# Altium PCB main.PcbDoc (part 10 of 16)
Units mil, origin at the board's own origin, x right, y up, seen from the top; angles counter-clockwise.
Board outline 8394.75 x 5164.44 mil, 7 copper layers (Top Layer 1, Layer 2, Layer 3, Unused, Layer 4_pow, Layer 5_gnd, Bottom 6+gnd), stack 64.043 mil thick; 364 components, 409 nets, 1932 pads, 1061 vias.
Unrouted connection lines stored in the file: 2.
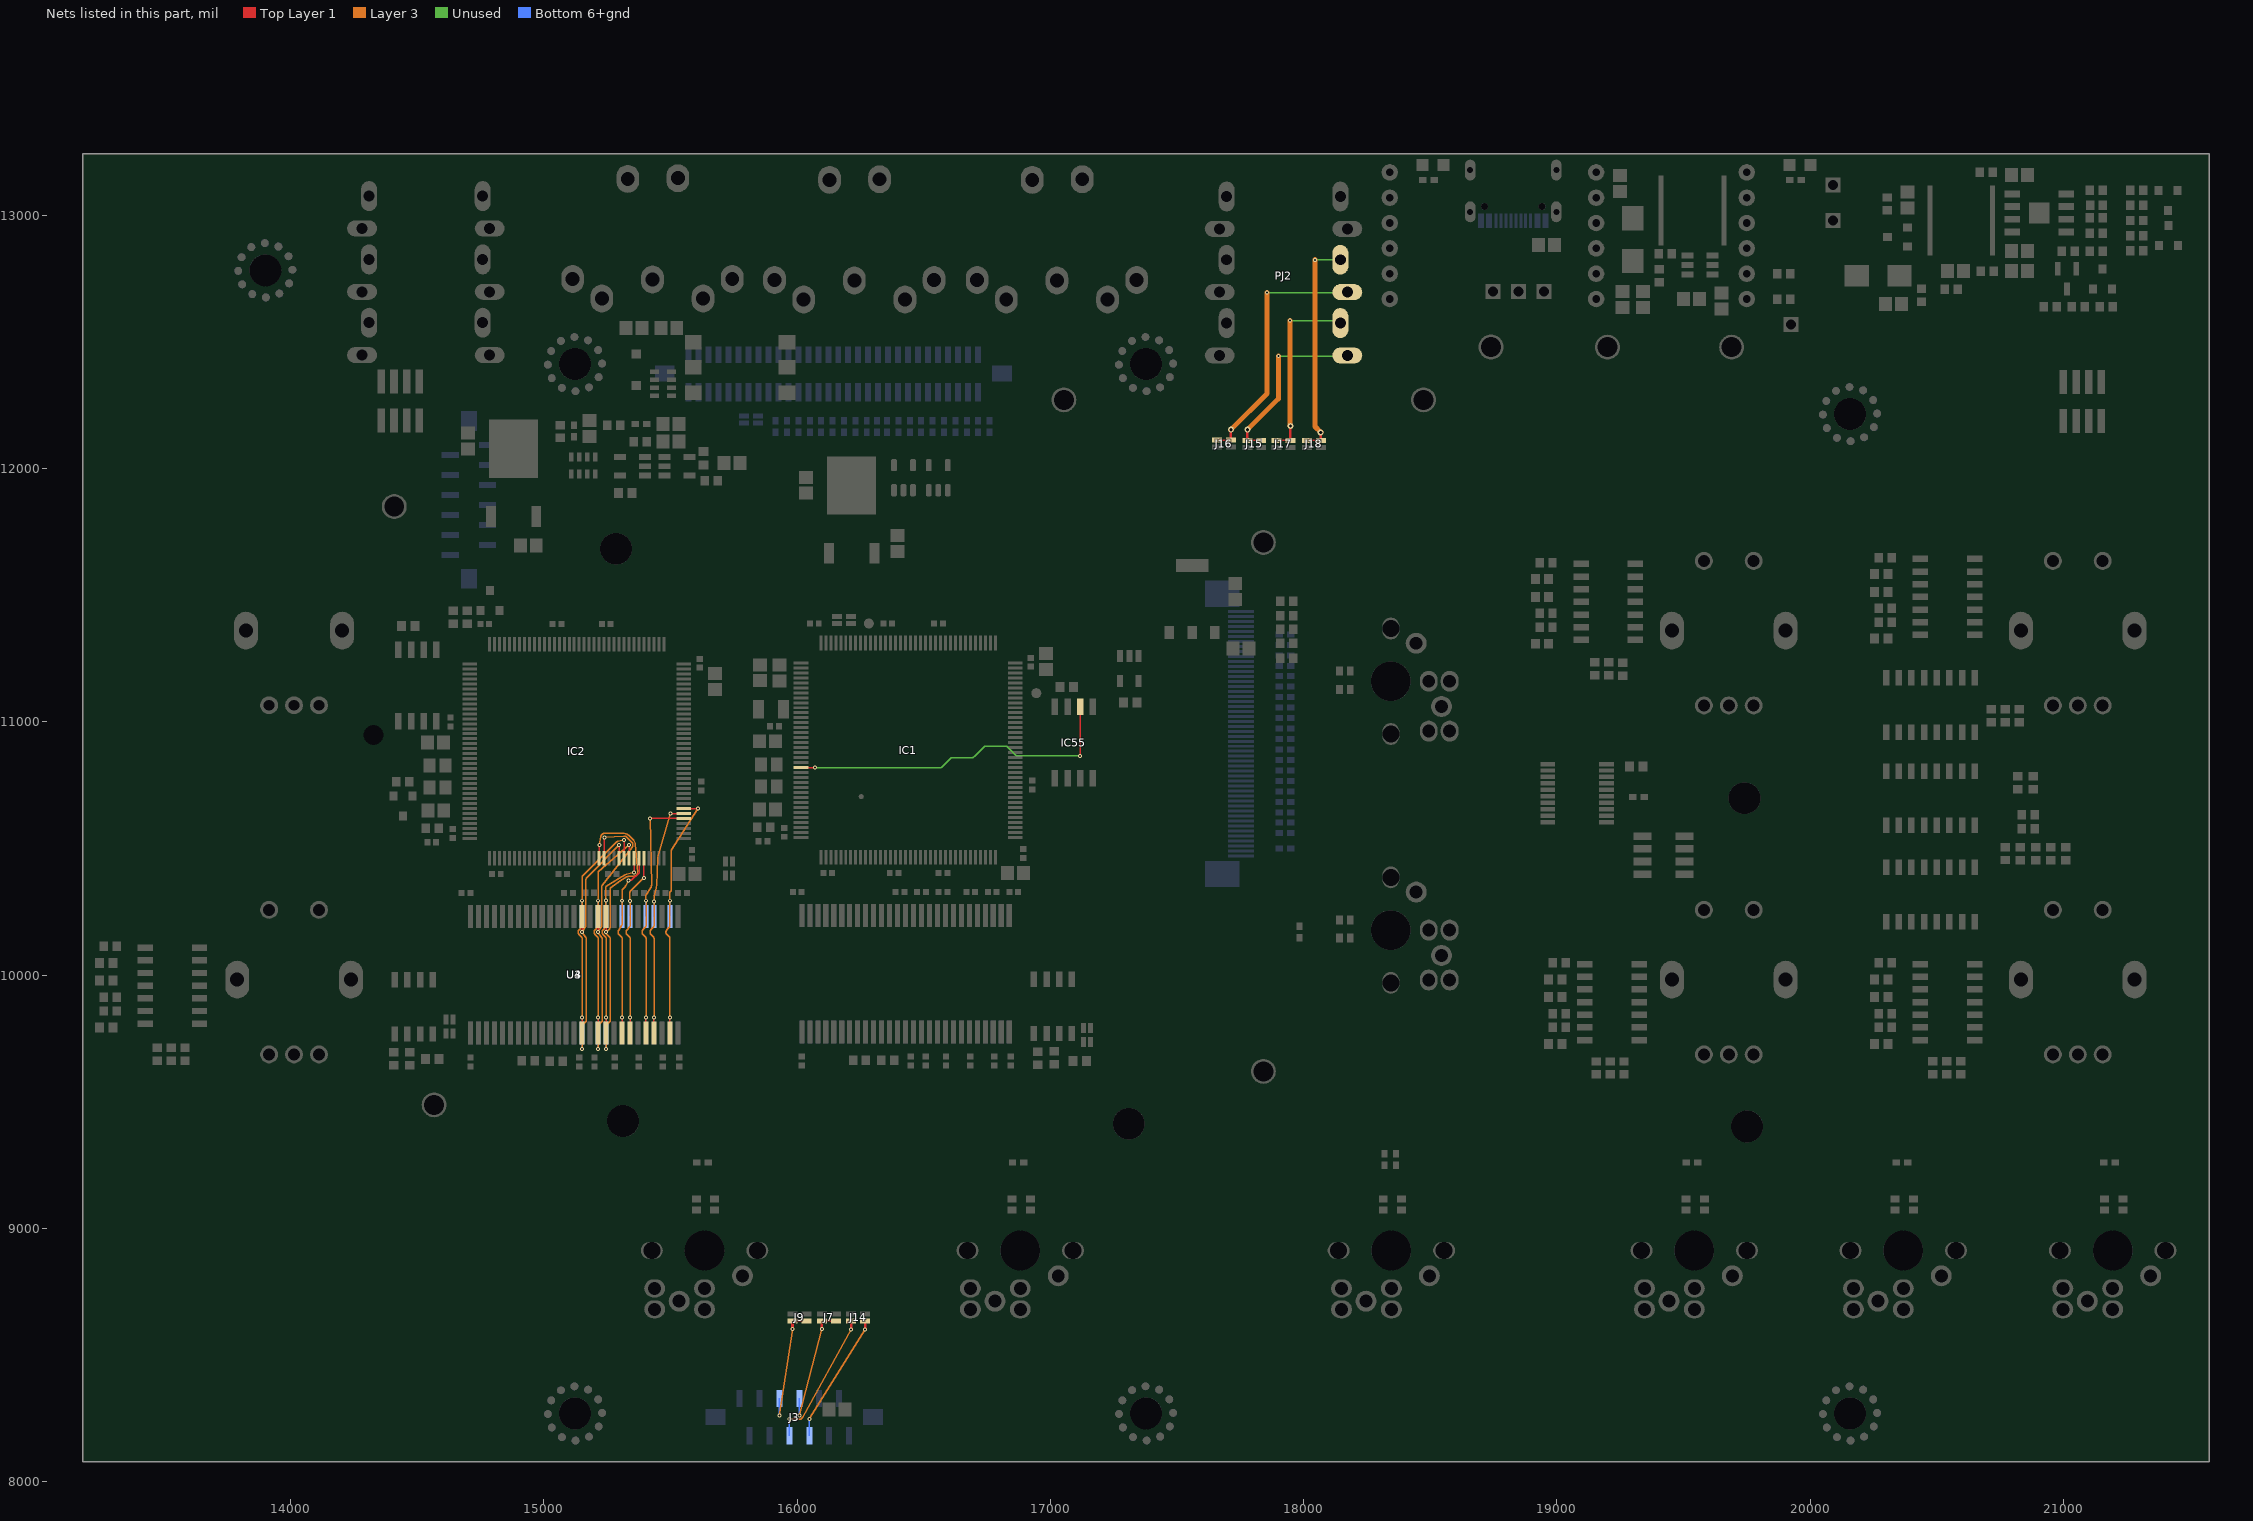
[diagram p13: the nets of this part, all layers, seen from the top]

## Via types
v1: diameter 15.75, hole 7.87, Top Layer 1 to Bottom 6+gnd, tented both sides, 961 vias
v2: diameter 27.56, hole 11.81, Top Layer 1 to Bottom 6+gnd, 45 vias
v3: diameter 23.62/23.62/23.62/23.62/23.62/23.62/23.62 (per signal layer), hole 12, Top Layer 1 to Bottom 6+gnd, tented top, 42 vias
v4: diameter 15.75, hole 7.87, Top Layer 1 to Bottom 6+gnd, 10 vias
v5: diameter 23.62/23.62/23.62/23.62/23.62/23.62/23.62 (per signal layer), hole 12, Top Layer 1 to Bottom 6+gnd, tented bottom, 3 vias

## Nets (pads, with @x,y where several pads share a name; then routed paths per layer and width w, separated by ;. In a path a pad name is that pad's centre, name@x,y a point inside that pad or via, vN(x,y) a via of type N, cw(c..) or ccw(c..) an arc to the next point about the centre after c; other vN are vias at no path point) (continued)
DD5: IC2.59 U3.10 U4.10 | length 2188.2
  Top Layer 1 w5: IC2.59@15218.43,10461.87 15219,10462.44 15219,10513.82 v1(15219.57,10514.39) ; v1@15245.83,10170.19 U3.10@15245.83,10232.03
  Layer 3 w5: v1(15219.57,10514.39) 15224.66,10547 cw(c15239.85,10544.63) 15239.9,10560 15317.01,10559.77 ; v1(15245.59,9709.31) 15245.59,9803 15261.71,9819.12 15261.71,10145.78 ; 15327.17,10387.95 cw(c15334.85,10374.63) 15334.15,10389.99 ; v1@15245.59,10167.87 ccw(c15250.59,10167.88) v1@15246.83,10164.58 ; v1@15245.59,10167.87 ccw(c15250.59,10167.88) v1@15246.83,10164.58 ; v1@15245.59,10167.87 ccw(c15250.59,10167.88) v1@15246.83,10164.58 ; v1@15245.59,10167.87 ccw(c15250.59,10167.88) v1@15246.83,10164.58 ; v1@15245.59,10167.87 ccw(c15250.59,10167.88) v1@15246.83,10164.58 ; v1@15245.59,10167.87 ccw(c15250.59,10167.88) v1@15246.83,10164.58 ; v1@15245.59,10167.87 ccw(c15250.59,10167.88) v1@15246.83,10164.58 ; v1@15245.59,10167.87 ccw(c15250.59,10167.88) v1@15246.83,10164.58 ; v1@15245.59,10167.87 ccw(c15250.59,10167.88) v1@15246.83,10164.58 ; v1@15245.59,10167.87 ccw(c15250.59,10167.88) v1@15246.83,10164.58 ; v1@15245.59,10167.87 ccw(c15250.59,10167.88) v1@15246.83,10164.58 ; v1@15245.59,10167.87 ccw(c15250.59,10167.88) v1@15246.83,10164.58 ; v1@15245.59,10167.87 ccw(c15250.59,10167.88) v1@15246.83,10164.58 ; v1@15245.59,10167.87 ccw(c15250.59,10167.88) v1@15246.83,10164.58 ; v1@15245.59,10167.87 ccw(c15250.59,10167.88) v1@15246.83,10164.58 ; v1@15245.59,10167.87 ccw(c15250.59,10167.88) v1@15246.83,10164.58 ; v1@15245.59,10167.87 v1(15245.59,10169.94) 15259.84,10184.24 ccw(c15256.3,10187.77) 15261.3,10187.68 15261.3,10340.53 cw(c15266.3,10340.53) 15263.3,10344.53 15300.79,10372.62 ; v1@15246.83,10164.58 15260.47,10149.04 ; 15260.47,10149.04 cw(c15256.71,10145.74) 15261.71,10145.83 ; 15260.47,10149.04 cw(c15256.71,10145.74) 15261.71,10145.83 ; 15260.47,10149.04 cw(c15256.71,10145.74) 15261.71,10145.83 ; 15260.47,10149.04 cw(c15256.71,10145.74) 15261.71,10145.83 ; 15260.47,10149.04 cw(c15256.71,10145.74) 15261.71,10145.83 ; 15260.47,10149.04 cw(c15256.71,10145.74) 15261.71,10145.83 ; 15260.47,10149.04 cw(c15256.71,10145.74) 15261.71,10145.83 ; 15260.47,10149.04 cw(c15256.71,10145.74) 15261.71,10145.83 ; 15260.47,10149.04 cw(c15256.71,10145.74) 15261.71,10145.83 ; 15260.47,10149.04 cw(c15256.71,10145.74) 15261.71,10145.83 ; 15260.47,10149.04 cw(c15256.71,10145.74) 15261.71,10145.83 ; 15260.47,10149.04 cw(c15256.71,10145.74) 15261.71,10145.83 ; 15260.47,10149.04 cw(c15256.71,10145.74) 15261.71,10145.83 ; 15260.47,10149.04 cw(c15256.71,10145.74) 15261.71,10145.83 ; 15260.47,10149.04 cw(c15256.71,10145.74) 15261.71,10145.83 ; 15260.47,10149.04 cw(c15256.71,10145.74) 15261.71,10145.83 ; 15300.79,10372.62 cw(c15310,10360.32) 15302.33,10373.64 ; 15300.79,10372.62 cw(c15310,10360.32) 15302.33,10373.64 ; 15300.79,10372.62 cw(c15310,10360.32) 15302.33,10373.64 ; 15300.79,10372.62 cw(c15310,10360.32) 15302.33,10373.64 ; 15300.79,10372.62 cw(c15310,10360.32) 15302.33,10373.64 ; 15300.79,10372.62 cw(c15310,10360.32) 15302.33,10373.64 ; 15300.79,10372.62 cw(c15310,10360.32) 15302.33,10373.64 ; 15300.79,10372.62 cw(c15310,10360.32) 15302.33,10373.64 ; 15300.79,10372.62 cw(c15310,10360.32) 15302.33,10373.64 ; 15300.79,10372.62 cw(c15310,10360.32) 15302.33,10373.64 ; 15300.79,10372.62 cw(c15310,10360.32) 15302.33,10373.64 ; 15300.79,10372.62 cw(c15310,10360.32) 15302.33,10373.64 ; 15300.79,10372.62 cw(c15310,10360.32) 15302.33,10373.64 ; 15300.79,10372.62 cw(c15310,10360.32) 15302.33,10373.64 ; 15300.79,10372.62 cw(c15310,10360.32) 15302.33,10373.64 ; 15300.79,10372.62 cw(c15310,10360.32) 15302.33,10373.64 ; 15302.33,10373.64 15327.18,10387.95 ; 15317.01,10559.77 cw(c15316.94,10534.39) 15335.17,10552.04 ; 15317.01,10559.77 cw(c15316.94,10534.39) 15335.17,10552.04 ; 15317.01,10559.77 cw(c15316.94,10534.39) 15335.17,10552.04 ; 15317.01,10559.77 cw(c15316.94,10534.39) 15335.17,10552.04 ; 15317.01,10559.77 cw(c15316.94,10534.39) 15335.17,10552.04 ; 15317.01,10559.77 cw(c15316.94,10534.39) 15335.17,10552.04 ; 15317.01,10559.77 cw(c15316.94,10534.39) 15335.17,10552.04 ; 15317.01,10559.77 cw(c15316.94,10534.39) 15335.17,10552.04 ; 15317.01,10559.77 cw(c15316.94,10534.39) 15335.17,10552.04 ; 15317.01,10559.77 cw(c15316.94,10534.39) 15335.17,10552.04 ; 15317.01,10559.77 cw(c15316.94,10534.39) 15335.17,10552.04 ; 15317.01,10559.77 cw(c15316.94,10534.39) 15335.17,10552.04 ; 15317.01,10559.77 cw(c15316.94,10534.39) 15335.17,10552.04 ; 15317.01,10559.77 cw(c15316.94,10534.39) 15335.17,10552.04 ; 15317.01,10559.77 cw(c15316.94,10534.39) 15335.17,10552.04 ; 15317.01,10559.77 cw(c15316.94,10534.39) 15335.17,10552.04 ; 15327.18,10387.95 cw(c15334.85,10374.63) 15334.15,10389.99 ; 15327.18,10387.95 cw(c15334.85,10374.63) 15334.15,10389.99 ; 15327.18,10387.95 cw(c15334.85,10374.63) 15334.15,10389.99 ; 15327.18,10387.95 cw(c15334.85,10374.63) 15334.15,10389.99 ; 15327.18,10387.95 cw(c15334.85,10374.63) 15334.15,10389.99 ; 15327.18,10387.95 cw(c15334.85,10374.63) 15334.15,10389.99 ; 15327.18,10387.95 cw(c15334.85,10374.63) 15334.15,10389.99 ; 15327.18,10387.95 cw(c15334.85,10374.63) 15334.15,10389.99 ; 15327.18,10387.95 cw(c15334.85,10374.63) 15334.15,10389.99 ; 15327.18,10387.95 cw(c15334.85,10374.63) 15334.15,10389.99 ; 15327.18,10387.95 cw(c15334.85,10374.63) 15334.15,10389.99 ; 15327.18,10387.95 cw(c15334.85,10374.63) 15334.15,10389.99 ; 15327.18,10387.95 cw(c15334.85,10374.63) 15334.15,10389.99 ; 15327.18,10387.95 cw(c15334.85,10374.63) 15334.15,10389.99 ; 15327.18,10387.95 cw(c15334.85,10374.63) 15334.15,10389.99 ; 15334.15,10389.99 15355.9,10390.97 ; 15335.17,10552.04 15354.53,10532.04 cw(c15336.31,10514.39) 15361.6,10516.47 15370.53,10407.59 ; 15355.9,10390.97 ccw(c15355.21,10406.33) 15370.53,10407.59 ; 15355.9,10390.97 ccw(c15355.21,10406.33) 15370.53,10407.59 ; 15355.9,10390.97 ccw(c15355.21,10406.33) 15370.53,10407.59 ; 15355.9,10390.97 ccw(c15355.21,10406.33) 15370.53,10407.59 ; 15355.9,10390.97 ccw(c15355.21,10406.33) 15370.53,10407.59 ; 15355.9,10390.97 ccw(c15355.21,10406.33) 15370.53,10407.59 ; 15355.9,10390.97 ccw(c15355.21,10406.33) 15370.53,10407.59 ; 15355.9,10390.97 ccw(c15355.21,10406.33) 15370.53,10407.59 ; 15355.9,10390.97 ccw(c15355.21,10406.33) 15370.53,10407.59 ; 15355.9,10390.97 ccw(c15355.21,10406.33) 15370.53,10407.59 ; 15355.9,10390.97 ccw(c15355.21,10406.33) 15370.53,10407.59 ; 15355.9,10390.97 ccw(c15355.21,10406.33) 15370.53,10407.59 ; 15355.9,10390.97 ccw(c15355.21,10406.33) 15370.53,10407.59 ; 15355.9,10390.97 ccw(c15355.21,10406.33) 15370.53,10407.59 ; 15355.9,10390.97 ccw(c15355.21,10406.33) 15370.53,10407.59 ; 15355.9,10390.97 ccw(c15355.21,10406.33) 15370.53,10407.59
  Bottom 6+gnd w5: v1@15245.83,9709.56 U4.10@15245.83,9771.4
DD6: IC2.60 U3.11 U4.11 | length 1584.3
  Top Layer 1 w5: v1@15214.34,10170.19 U3.11@15214.34,10232.03 ; IC2.60@15238.28,10461.71 15238.98,10462.42 15238.98,10543.76 v1(15239.85,10544.63)
  Layer 3 w5: v1(15214.09,9709.31) 15214.09,9803 15230.21,9819.12 15230.21,10145.78 ; v1(15214.09,10169.94) ccw(c15219.09,10169.94) 15215.14,10166.88 15229.17,10148.8 ; 15229.47,10196.3 15229.47,10352.17 ; v1(15239.85,10544.63) 15315.91,10549.73 ; v1(15214.09,10169.94) cw(c15219.09,10169.94) v1@15214.93,10172.71 ; v1(15214.09,10169.94) cw(c15219.09,10169.94) v1@15214.93,10172.71 ; v1(15214.09,10169.94) cw(c15219.09,10169.94) v1@15214.93,10172.71 ; v1(15214.09,10169.94) cw(c15219.09,10169.94) v1@15214.93,10172.71 ; v1(15214.09,10169.94) cw(c15219.09,10169.94) v1@15214.93,10172.71 ; v1(15214.09,10169.94) cw(c15219.09,10169.94) v1@15214.93,10172.71 ; v1(15214.09,10169.94) cw(c15219.09,10169.94) v1@15214.93,10172.71 ; v1(15214.09,10169.94) cw(c15219.09,10169.94) v1@15214.93,10172.71 ; v1(15214.09,10169.94) cw(c15219.09,10169.94) v1@15214.93,10172.71 ; v1(15214.09,10169.94) cw(c15219.09,10169.94) v1@15214.93,10172.71 ; v1(15214.09,10169.94) cw(c15219.09,10169.94) v1@15214.93,10172.71 ; v1(15214.09,10169.94) cw(c15219.09,10169.94) v1@15214.93,10172.71 ; v1(15214.09,10169.94) cw(c15219.09,10169.94) v1@15214.93,10172.71 ; v1(15214.09,10169.94) cw(c15219.09,10169.94) v1@15214.93,10172.71 ; v1(15214.09,10169.94) cw(c15219.09,10169.94) v1@15214.93,10172.71 ; v1(15214.09,10169.94) cw(c15219.09,10169.94) v1@15214.93,10172.71 ; v1@15214.93,10172.71 15228.65,10193.6 ; 15228.65,10193.61 ccw(c15224.47,10196.34) 15229.47,10196.25 ; 15228.65,10193.61 ccw(c15224.47,10196.34) 15229.47,10196.25 ; 15228.65,10193.61 ccw(c15224.47,10196.34) 15229.47,10196.25 ; 15228.65,10193.61 ccw(c15224.47,10196.34) 15229.47,10196.25 ; 15228.65,10193.61 ccw(c15224.47,10196.34) 15229.47,10196.25 ; 15228.65,10193.61 ccw(c15224.47,10196.34) 15229.47,10196.25 ; 15228.65,10193.61 ccw(c15224.47,10196.34) 15229.47,10196.25 ; 15228.65,10193.61 ccw(c15224.47,10196.34) 15229.47,10196.25 ; 15228.65,10193.61 ccw(c15224.47,10196.34) 15229.47,10196.25 ; 15228.65,10193.61 ccw(c15224.47,10196.34) 15229.47,10196.25 ; 15228.65,10193.61 ccw(c15224.47,10196.34) 15229.47,10196.25 ; 15228.65,10193.61 ccw(c15224.47,10196.34) 15229.47,10196.25 ; 15228.65,10193.6 ccw(c15224.47,10196.34) 15229.47,10196.25 ; 15228.65,10193.6 ccw(c15224.47,10196.34) 15229.47,10196.25 ; 15228.65,10193.6 ccw(c15224.47,10196.34) 15229.47,10196.25 ; 15228.65,10193.6 ccw(c15224.47,10196.34) 15229.47,10196.25 ; 15229.16,10148.8 cw(c15225.21,10145.74) 15230.21,10145.83 ; 15229.16,10148.8 cw(c15225.21,10145.74) 15230.21,10145.83 ; 15229.16,10148.8 cw(c15225.21,10145.74) 15230.21,10145.83 ; 15229.16,10148.8 cw(c15225.21,10145.74) 15230.21,10145.83 ; 15229.16,10148.8 cw(c15225.21,10145.74) 15230.21,10145.83 ; 15229.16,10148.8 cw(c15225.21,10145.74) 15230.21,10145.83 ; 15229.16,10148.8 cw(c15225.21,10145.74) 15230.21,10145.83 ; 15229.16,10148.8 cw(c15225.21,10145.74) 15230.21,10145.83 ; 15229.16,10148.8 cw(c15225.21,10145.74) 15230.21,10145.83 ; 15229.16,10148.8 cw(c15225.21,10145.74) 15230.21,10145.83 ; 15229.16,10148.8 cw(c15225.21,10145.74) 15230.21,10145.83 ; 15229.16,10148.8 cw(c15225.21,10145.74) 15230.21,10145.83 ; 15229.16,10148.8 cw(c15225.21,10145.74) 15230.21,10145.83 ; 15229.16,10148.8 cw(c15225.21,10145.74) 15230.21,10145.83 ; 15229.16,10148.8 cw(c15225.21,10145.74) 15230.21,10145.83 ; 15229.16,10148.8 cw(c15225.21,10145.74) 15230.21,10145.83 ; 15229.47,10352.17 cw(c15234.47,10352.17) 15230.54,10355.27 ; 15229.47,10352.17 cw(c15234.47,10352.17) 15230.54,10355.27 ; 15229.47,10352.17 cw(c15234.47,10352.17) 15230.54,10355.27 ; 15229.47,10352.17 cw(c15234.47,10352.17) 15230.54,10355.27 ; 15229.47,10352.17 cw(c15234.47,10352.17) 15230.54,10355.27 ; 15229.47,10352.17 cw(c15234.47,10352.17) 15230.54,10355.27 ; 15229.47,10352.17 cw(c15234.47,10352.17) 15230.54,10355.27 ; 15229.47,10352.17 cw(c15234.47,10352.17) 15230.54,10355.27 ; 15229.47,10352.17 cw(c15234.47,10352.17) 15230.54,10355.27 ; 15229.47,10352.17 cw(c15234.47,10352.17) 15230.54,10355.27 ; 15229.47,10352.17 cw(c15234.47,10352.17) 15230.54,10355.27 ; 15229.47,10352.17 cw(c15234.47,10352.17) 15230.54,10355.27 ; 15229.47,10352.17 cw(c15234.47,10352.17) 15230.54,10355.27 ; 15229.47,10352.17 cw(c15234.47,10352.17) 15230.54,10355.27 ; 15229.47,10352.17 cw(c15234.47,10352.17) 15230.54,10355.27 ; 15229.47,10352.17 cw(c15234.47,10352.17) 15230.54,10355.27 ; 15230.54,10355.27 15348.38,10504.88 ccw(c15336.31,10514.39) 15347.35,10525.09 15327.98,10545.09 ; 15315.91,10549.73 cw(c15316.94,10534.39) 15327.98,10545.09 ; 15315.91,10549.73 cw(c15316.94,10534.39) 15327.98,10545.09 ; 15315.91,10549.73 cw(c15316.94,10534.39) 15327.98,10545.09 ; 15315.91,10549.73 cw(c15316.94,10534.39) 15327.98,10545.09 ; 15315.91,10549.73 cw(c15316.94,10534.39) 15327.98,10545.09 ; 15315.91,10549.73 cw(c15316.94,10534.39) 15327.98,10545.09 ; 15315.91,10549.73 cw(c15316.94,10534.39) 15327.98,10545.09 ; 15315.91,10549.73 cw(c15316.94,10534.39) 15327.98,10545.09 ; 15315.91,10549.73 cw(c15316.94,10534.39) 15327.98,10545.09 ; 15315.91,10549.73 cw(c15316.94,10534.39) 15327.98,10545.09 ; 15315.91,10549.73 cw(c15316.94,10534.39) 15327.98,10545.09 ; 15315.91,10549.73 cw(c15316.94,10534.39) 15327.98,10545.09 ; 15315.91,10549.73 cw(c15316.94,10534.39) 15327.98,10545.09 ; 15315.91,10549.73 cw(c15316.94,10534.39) 15327.98,10545.09 ; 15315.91,10549.73 cw(c15316.94,10534.39) 15327.98,10545.09 ; 15315.91,10549.73 cw(c15316.94,10534.39) 15327.98,10545.09
  Bottom 6+gnd w5: v1@15214.34,9709.56 U4.11@15214.34,9771.4
DD7: IC2.63 U3.13 U4.13 | length 1246.9
  Top Layer 1 w5: v1@15151.35,10170.19 U3.13@15151.35,10232.03 ; IC2.63@15297.23,10461.87 v1@15297.17,10514.16
  Layer 3 w5: v1(15151.1,9709.31) 15151.1,9803 15166.96,9818.86 15166.96,10146.04 ; v1(15151.1,10169.94) cw(c15156.1,10169.94) 15151.92,10172.68 15165.65,10193.6 ; 15166.47,10196.3 15166.47,10379.18 ; v1(15296.94,10514.39) 15167.9,10382.68 ccw(c15171.47,10379.18) 15166.47,10379.18 ; v1(15151.1,10169.94) ccw(c15156.1,10169.94) v1@15152.14,10166.89 ; v1(15151.1,10169.94) ccw(c15156.1,10169.94) v1@15152.13,10166.9 ; v1(15151.1,10169.94) ccw(c15156.1,10169.94) v1@15152.13,10166.9 ; v1(15151.1,10169.94) ccw(c15156.1,10169.94) v1@15152.13,10166.9 ; v1(15151.1,10169.94) ccw(c15156.1,10169.94) v1@15152.13,10166.9 ; v1(15151.1,10169.94) ccw(c15156.1,10169.94) v1@15152.13,10166.9 ; v1(15151.1,10169.94) ccw(c15156.1,10169.94) v1@15152.13,10166.9 ; v1(15151.1,10169.94) ccw(c15156.1,10169.94) v1@15152.13,10166.9 ; v1(15151.1,10169.94) ccw(c15156.1,10169.94) v1@15152.13,10166.9 ; v1(15151.1,10169.94) ccw(c15156.1,10169.94) v1@15152.13,10166.9 ; v1(15151.1,10169.94) ccw(c15156.1,10169.94) v1@15152.13,10166.9 ; v1(15151.1,10169.94) ccw(c15156.1,10169.94) v1@15152.13,10166.9 ; v1(15151.1,10169.94) ccw(c15156.1,10169.94) v1@15152.13,10166.9 ; v1(15151.1,10169.94) ccw(c15156.1,10169.94) v1@15152.13,10166.9 ; v1(15151.1,10169.94) ccw(c15156.1,10169.94) v1@15152.13,10166.9 ; v1(15151.1,10169.94) ccw(c15156.1,10169.94) v1@15152.13,10166.9 ; v1@15152.14,10166.89 15165.92,10149.05 ; 15165.66,10193.6 ccw(c15161.47,10196.34) 15166.47,10196.25 ; 15165.66,10193.6 ccw(c15161.47,10196.34) 15166.47,10196.25 ; 15165.66,10193.6 ccw(c15161.47,10196.34) 15166.47,10196.25 ; 15165.66,10193.6 ccw(c15161.47,10196.34) 15166.47,10196.25 ; 15165.66,10193.6 ccw(c15161.47,10196.34) 15166.47,10196.25 ; 15165.66,10193.6 ccw(c15161.47,10196.34) 15166.47,10196.25 ; 15165.66,10193.6 ccw(c15161.47,10196.34) 15166.47,10196.25 ; 15165.66,10193.6 ccw(c15161.47,10196.34) 15166.47,10196.25 ; 15165.66,10193.6 ccw(c15161.47,10196.34) 15166.47,10196.25 ; 15165.66,10193.6 ccw(c15161.47,10196.34) 15166.47,10196.25 ; 15165.66,10193.6 ccw(c15161.47,10196.34) 15166.47,10196.25 ; 15165.66,10193.6 ccw(c15161.47,10196.34) 15166.47,10196.25 ; 15165.66,10193.6 ccw(c15161.47,10196.34) 15166.47,10196.25 ; 15165.66,10193.6 ccw(c15161.47,10196.34) 15166.47,10196.25 ; 15165.66,10193.6 ccw(c15161.47,10196.34) 15166.47,10196.25 ; 15165.65,10193.6 ccw(c15161.47,10196.34) 15166.47,10196.25 ; 15165.92,10149.05 cw(c15161.96,10146) 15166.96,10146.09 ; 15165.92,10149.05 cw(c15161.96,10146) 15166.96,10146.09 ; 15165.92,10149.05 cw(c15161.96,10146) 15166.96,10146.09 ; 15165.92,10149.05 cw(c15161.96,10146) 15166.96,10146.09 ; 15165.92,10149.05 cw(c15161.96,10146) 15166.96,10146.09 ; 15165.92,10149.05 cw(c15161.96,10146) 15166.96,10146.09 ; 15165.92,10149.05 cw(c15161.96,10146) 15166.96,10146.09 ; 15165.92,10149.05 cw(c15161.96,10146) 15166.96,10146.09 ; 15165.92,10149.05 cw(c15161.96,10146) 15166.96,10146.09 ; 15165.92,10149.05 cw(c15161.96,10146) 15166.96,10146.09 ; 15165.92,10149.05 cw(c15161.96,10146) 15166.96,10146.09 ; 15165.92,10149.05 cw(c15161.96,10146) 15166.96,10146.09 ; 15165.92,10149.05 cw(c15161.96,10146) 15166.96,10146.09 ; 15165.92,10149.05 cw(c15161.96,10146) 15166.96,10146.09 ; 15165.92,10149.05 cw(c15161.96,10146) 15166.96,10146.09 ; 15165.92,10149.05 cw(c15161.96,10146) 15166.96,10146.09 ; 15166.47,10379.18 cw(c15171.47,10379.18) 15167.89,10382.67 ; 15166.47,10379.18 cw(c15171.47,10379.18) 15167.89,10382.67 ; 15166.47,10379.18 cw(c15171.47,10379.18) 15167.89,10382.67 ; 15166.47,10379.18 cw(c15171.47,10379.18) 15167.89,10382.67 ; 15166.47,10379.18 cw(c15171.47,10379.18) 15167.89,10382.67 ; 15166.47,10379.18 cw(c15171.47,10379.18) 15167.89,10382.67 ; 15166.47,10379.18 cw(c15171.47,10379.18) 15167.89,10382.67 ; 15166.47,10379.18 cw(c15171.47,10379.18) 15167.89,10382.66 ; 15166.47,10379.18 cw(c15171.47,10379.18) 15167.89,10382.66 ; 15166.47,10379.18 cw(c15171.47,10379.18) 15167.89,10382.66 ; 15166.47,10379.18 cw(c15171.47,10379.18) 15167.89,10382.66 ; 15166.47,10379.18 cw(c15171.47,10379.18) 15167.89,10382.66 ; 15166.47,10379.18 cw(c15171.47,10379.18) 15167.89,10382.66 ; 15166.47,10379.18 cw(c15171.47,10379.18) 15167.89,10382.66 ; 15166.47,10379.18 cw(c15171.47,10379.18) 15167.89,10382.66
  Bottom 6+gnd w5: v1@15151.35,9709.56 U4.13@15151.35,9771.4
DD8: IC2.64 U3.42 U4.42 | length 1288.6
  Top Layer 1 w5: U3.42@15151.35,9771.4 v1@15151.35,9833.24 ; IC2.64@15317.02,10461.71 v1@15317.02,10534.31
  Layer 3 w5: v1(15151.59,9833.49) 15151.59,10145.64 ; 15151.59,10195.56 15151.59,10293.63 v1(15151.1,10294.12) 15151.1,10388.23 ; v1(15316.94,10534.39) 15293.72,10529.43 ; 15150.13,10149.12 cw(c15146.59,10145.59) 15151.59,10145.68 ; 15150.13,10149.12 cw(c15146.59,10145.59) 15151.59,10145.68 ; 15150.13,10149.12 cw(c15146.59,10145.59) 15151.59,10145.68 ; 15150.13,10149.12 cw(c15146.59,10145.59) 15151.59,10145.68 ; 15150.13,10149.12 cw(c15146.59,10145.59) 15151.59,10145.68 ; 15150.13,10149.12 cw(c15146.59,10145.59) 15151.59,10145.68 ; 15150.13,10149.12 cw(c15146.59,10145.59) 15151.59,10145.68 ; 15150.13,10149.12 cw(c15146.59,10145.59) 15151.59,10145.68 ; 15150.13,10149.12 cw(c15146.59,10145.59) 15151.59,10145.68 ; 15150.13,10149.12 cw(c15146.59,10145.59) 15151.59,10145.68 ; 15150.13,10149.12 cw(c15146.59,10145.59) 15151.59,10145.68 ; 15150.13,10149.12 cw(c15146.59,10145.59) 15151.59,10145.68 ; 15150.13,10149.12 cw(c15146.59,10145.59) 15151.59,10145.68 ; 15150.13,10149.12 cw(c15146.59,10145.59) 15151.59,10145.68 ; 15150.13,10149.12 cw(c15146.59,10145.59) 15151.59,10145.68 ; 15150.13,10149.12 cw(c15146.59,10145.59) 15151.59,10145.68 ; 15150.13,10149.12 15140.21,10159.1 cw(c15151.1,10169.94) 15139.58,10180.12 15150.34,10192.29 ; 15150.34,10192.29 ccw(c15146.59,10195.6) 15151.59,10195.51 ; 15150.34,10192.29 ccw(c15146.59,10195.6) 15151.59,10195.51 ; 15150.34,10192.29 ccw(c15146.59,10195.6) 15151.59,10195.51 ; 15150.34,10192.29 ccw(c15146.59,10195.6) 15151.59,10195.51 ; 15150.34,10192.29 ccw(c15146.59,10195.6) 15151.59,10195.51 ; 15150.34,10192.29 ccw(c15146.59,10195.6) 15151.59,10195.51 ; 15150.34,10192.29 ccw(c15146.59,10195.6) 15151.59,10195.51 ; 15150.34,10192.29 ccw(c15146.59,10195.6) 15151.59,10195.51 ; 15150.34,10192.29 ccw(c15146.59,10195.6) 15151.59,10195.51 ; 15150.34,10192.29 ccw(c15146.59,10195.6) 15151.59,10195.51 ; 15150.34,10192.29 ccw(c15146.59,10195.6) 15151.59,10195.51 ; 15150.34,10192.29 ccw(c15146.59,10195.6) 15151.59,10195.51 ; 15150.34,10192.29 ccw(c15146.59,10195.6) 15151.59,10195.51 ; 15150.34,10192.29 ccw(c15146.59,10195.6) 15151.59,10195.51 ; 15150.34,10192.29 ccw(c15146.59,10195.6) 15151.59,10195.51 ; 15150.34,10192.29 ccw(c15146.59,10195.6) 15151.59,10195.51 ; 15151.1,10388.23 cw(c15156.1,10388.23) 15152.55,10391.74 ; 15151.1,10388.23 cw(c15156.1,10388.23) 15152.55,10391.74 ; 15151.1,10388.23 cw(c15156.1,10388.23) 15152.55,10391.74 ; 15151.1,10388.23 cw(c15156.1,10388.23) 15152.55,10391.74 ; 15151.1,10388.23 cw(c15156.1,10388.23) 15152.55,10391.74 ; 15151.1,10388.23 cw(c15156.1,10388.23) 15152.55,10391.74 ; 15151.1,10388.23 cw(c15156.1,10388.23) 15152.55,10391.74 ; 15151.1,10388.23 cw(c15156.1,10388.23) 15152.55,10391.74 ; 15151.1,10388.23 cw(c15156.1,10388.23) 15152.55,10391.74 ; 15151.1,10388.23 cw(c15156.1,10388.23) 15152.55,10391.74 ; 15151.1,10388.23 cw(c15156.1,10388.23) 15152.55,10391.74 ; 15151.1,10388.23 cw(c15156.1,10388.23) 15152.55,10391.74 ; 15151.1,10388.23 cw(c15156.1,10388.23) 15152.55,10391.74 ; 15151.1,10388.23 cw(c15156.1,10388.23) 15152.55,10391.74 ; 15151.1,10388.23 cw(c15156.1,10388.23) 15152.55,10391.74 ; 15151.1,10388.23 cw(c15156.1,10388.23) 15152.55,10391.74 ; 15152.55,10391.74 15286.08,10525.28 ; 15286.08,10525.28 cw(c15296.94,10514.39) 15293.72,10529.43 ; 15286.08,10525.28 cw(c15296.94,10514.39) 15293.72,10529.43 ; 15286.08,10525.28 cw(c15296.94,10514.39) 15293.72,10529.43 ; 15286.08,10525.28 cw(c15296.94,10514.39) 15293.72,10529.43 ; 15286.08,10525.28 cw(c15296.94,10514.39) 15293.72,10529.43 ; 15286.08,10525.28 cw(c15296.94,10514.39) 15293.72,10529.43 ; 15286.08,10525.28 cw(c15296.94,10514.39) 15293.72,10529.43 ; 15286.08,10525.28 cw(c15296.94,10514.39) 15293.72,10529.43 ; 15286.08,10525.28 cw(c15296.94,10514.39) 15293.72,10529.43 ; 15286.08,10525.28 cw(c15296.94,10514.39) 15293.72,10529.43 ; 15286.08,10525.28 cw(c15296.94,10514.39) 15293.72,10529.43 ; 15286.08,10525.28 cw(c15296.94,10514.39) 15293.72,10529.43 ; 15286.08,10525.28 cw(c15296.94,10514.39) 15293.72,10529.43 ; 15286.08,10525.28 cw(c15296.94,10514.39) 15293.72,10529.43 ; 15286.08,10525.28 cw(c15296.94,10514.39) 15293.72,10529.43 ; 15286.08,10525.28 cw(c15296.94,10514.39) 15293.72,10529.43
  Bottom 6+gnd w5: U4.42@15151.35,10232.03 v1@15151.35,10293.87
DD9: IC2.65 U3.44 U4.44 | length 1096.9
  Top Layer 1 w5: U3.44@15214.34,9771.4 v1@15214.34,9833.24 ; IC2.65@15336.54,10461.87 v1@15336.54,10514.16
  Layer 3 w5: v1(15214.58,9833.49) 15214.58,10145.64 ; 15214.58,10195.56 15214.58,10293.63 v1(15214.09,10294.12) 15214.09,10404.3 ; v1(15336.31,10514.39) 15215.78,10408.04 ; 15213.13,10149.12 cw(c15209.58,10145.59) 15214.58,10145.68 ; 15213.13,10149.12 cw(c15209.58,10145.59) 15214.58,10145.68 ; 15213.13,10149.12 cw(c15209.58,10145.59) 15214.58,10145.68 ; 15213.13,10149.12 cw(c15209.58,10145.59) 15214.58,10145.68 ; 15213.13,10149.12 cw(c15209.58,10145.59) 15214.58,10145.68 ; 15213.13,10149.12 cw(c15209.58,10145.59) 15214.58,10145.68 ; 15213.13,10149.12 cw(c15209.58,10145.59) 15214.58,10145.68 ; 15213.13,10149.12 cw(c15209.58,10145.59) 15214.58,10145.68 ; 15213.13,10149.12 cw(c15209.58,10145.59) 15214.58,10145.68 ; 15213.13,10149.12 cw(c15209.58,10145.59) 15214.58,10145.68 ; 15213.13,10149.12 cw(c15209.58,10145.59) 15214.58,10145.68 ; 15213.13,10149.12 cw(c15209.58,10145.59) 15214.58,10145.68 ; 15213.13,10149.12 cw(c15209.58,10145.59) 15214.58,10145.68 ; 15213.13,10149.12 cw(c15209.58,10145.59) 15214.58,10145.68 ; 15213.13,10149.12 cw(c15209.58,10145.59) 15214.58,10145.68 ; 15213.13,10149.12 cw(c15209.58,10145.59) 15214.58,10145.68 ; 15213.13,10149.12 15203.2,10159.1 cw(c15214.09,10169.94) 15202.57,10180.12 15213.33,10192.29 ; 15213.33,10192.29 ccw(c15209.58,10195.6) 15214.58,10195.51 ; 15213.33,10192.29 ccw(c15209.58,10195.6) 15214.58,10195.51 ; 15213.33,10192.29 ccw(c15209.58,10195.6) 15214.58,10195.51 ; 15213.33,10192.29 ccw(c15209.58,10195.6) 15214.58,10195.51 ; 15213.33,10192.29 ccw(c15209.58,10195.6) 15214.58,10195.51 ; 15213.33,10192.29 ccw(c15209.58,10195.6) 15214.58,10195.51 ; 15213.33,10192.29 ccw(c15209.58,10195.6) 15214.58,10195.51 ; 15213.33,10192.29 ccw(c15209.58,10195.6) 15214.58,10195.51 ; 15213.33,10192.29 ccw(c15209.58,10195.6) 15214.58,10195.51 ; 15213.33,10192.29 ccw(c15209.58,10195.6) 15214.58,10195.51 ; 15213.33,10192.29 ccw(c15209.58,10195.6) 15214.58,10195.51 ; 15213.33,10192.29 ccw(c15209.58,10195.6) 15214.58,10195.51 ; 15213.33,10192.29 ccw(c15209.58,10195.6) 15214.58,10195.51 ; 15213.33,10192.29 ccw(c15209.58,10195.6) 15214.58,10195.51 ; 15213.33,10192.29 ccw(c15209.58,10195.6) 15214.58,10195.51 ; 15213.33,10192.29 ccw(c15209.58,10195.6) 15214.58,10195.51 ; 15214.09,10404.3 cw(c15219.09,10404.3) 15215.78,10408.05 ; 15214.09,10404.3 cw(c15219.09,10404.3) 15215.78,10408.05 ; 15214.09,10404.3 cw(c15219.09,10404.3) 15215.78,10408.05 ; 15214.09,10404.3 cw(c15219.09,10404.3) 15215.78,10408.05 ; 15214.09,10404.3 cw(c15219.09,10404.3) 15215.78,10408.05 ; 15214.09,10404.3 cw(c15219.09,10404.3) 15215.78,10408.05 ; 15214.09,10404.3 cw(c15219.09,10404.3) 15215.78,10408.05 ; 15214.09,10404.3 cw(c15219.09,10404.3) 15215.78,10408.05 ; 15214.09,10404.3 cw(c15219.09,10404.3) 15215.78,10408.05 ; 15214.09,10404.3 cw(c15219.09,10404.3) 15215.78,10408.05 ; 15214.09,10404.3 cw(c15219.09,10404.3) 15215.78,10408.05 ; 15214.09,10404.3 cw(c15219.09,10404.3) 15215.78,10408.05 ; 15214.09,10404.3 cw(c15219.09,10404.3) 15215.78,10408.05 ; 15214.09,10404.3 cw(c15219.09,10404.3) 15215.78,10408.05 ; 15214.09,10404.3 cw(c15219.09,10404.3) 15215.78,10408.05 ; 15214.09,10404.3 cw(c15219.09,10404.3) 15215.78,10408.05
  Bottom 6+gnd w5: U4.44@15214.34,10232.03 v1@15214.34,10293.87
DD10: IC2.66 U3.45 U4.45 | length 910.2
  Top Layer 1 w5: U3.45@15245.83,9771.4 v1@15245.83,9833.24 ; v1(15355.21,10406.33) 15356.12,10407.25 IC2.66@15356.12,10461.96
  Layer 3 w5: 15233.98,10180.02 ccw(c15245.59,10169.94) 15234.69,10159.1 15244.62,10149.12 ; 15233.99,10180.03 15243.62,10191.09 ccw(c15239.85,10194.37) 15244.85,10194.28 ; 15244.85,10194.33 v1(15244.85,10294.63) 15244.85,10347.56 ; v1(15246.08,9833.49) 15246.08,10145.64 ; v1(15355.21,10406.33) 15328.3,10399.14 ccw(c15334.85,10374.63) 15322.18,10396.62 15297.34,10382.3 ccw(c15310,10360.32) 15296.81,10381.99 15247.25,10351.83 ; 15244.62,10149.12 cw(c15241.08,10145.59) 15246.08,10145.68 ; 15244.62,10149.12 cw(c15241.08,10145.59) 15246.08,10145.68 ; 15244.62,10149.12 cw(c15241.08,10145.59) 15246.08,10145.68 ; 15244.62,10149.12 cw(c15241.08,10145.59) 15246.08,10145.68 ; 15244.62,10149.12 cw(c15241.08,10145.59) 15246.08,10145.68 ; 15244.62,10149.12 cw(c15241.08,10145.59) 15246.08,10145.68 ; 15244.62,10149.12 cw(c15241.08,10145.59) 15246.08,10145.68 ; 15244.62,10149.12 cw(c15241.08,10145.59) 15246.08,10145.68 ; 15244.62,10149.12 cw(c15241.08,10145.59) 15246.08,10145.68 ; 15244.62,10149.12 cw(c15241.08,10145.59) 15246.08,10145.68 ; 15244.62,10149.12 cw(c15241.08,10145.59) 15246.08,10145.68 ; 15244.62,10149.12 cw(c15241.08,10145.59) 15246.08,10145.68 ; 15244.62,10149.12 cw(c15241.08,10145.59) 15246.08,10145.68 ; 15244.62,10149.12 cw(c15241.08,10145.59) 15246.08,10145.68 ; 15244.62,10149.12 cw(c15241.08,10145.59) 15246.08,10145.68 ; 15244.62,10149.12 cw(c15241.08,10145.59) 15246.08,10145.68 ; 15244.85,10347.56 cw(c15249.85,10347.56) 15247.25,10351.83 ; 15244.85,10347.56 cw(c15249.85,10347.56) 15247.25,10351.83 ; 15244.85,10347.56 cw(c15249.85,10347.56) 15247.25,10351.83 ; 15244.85,10347.56 cw(c15249.85,10347.56) 15247.25,10351.83 ; 15244.85,10347.56 cw(c15249.85,10347.56) 15247.25,10351.83
  Bottom 6+gnd w5: v1(15244.85,10294.63) 15244.85,10233.01 U4.45@15245.83,10232.03
DD11: IC2.67 U3.47 U4.47 | length 1291.6
  Top Layer 1 w5: U3.47@15308.83,9771.4 v1@15308.83,9833.24 ; v1(15334.85,10374.63) 15345.25,10374.63 15375.91,10405.29 IC2.67@15375.91,10461.87
  Layer 3 w5: v1(15309.07,9833.49) 15309.07,10145.64 ; 15309.07,10200.79 cw(c15304.07,10200.88) 15308.29,10198.2 15295.6,10178.18 ; 15309.07,10200.83 15309.07,10293.59 v1(15309.58,10294.1) 15309.58,10336.08 ; 15323.63,10353.18 v1(15334.85,10374.63) ; 15295.6,10178.18 ccw(c15308.58,10169.94) 15297.73,10159.05 ; 15295.6,10178.18 ccw(c15308.58,10169.94) 15297.73,10159.05 ; 15295.6,10178.18 ccw(c15308.58,10169.94) 15297.73,10159.05 ; 15295.6,10178.18 ccw(c15308.58,10169.94) 15297.73,10159.05 ; 15295.6,10178.18 ccw(c15308.58,10169.94) 15297.73,10159.05 ; 15295.6,10178.18 ccw(c15308.58,10169.94) 15297.73,10159.05 ; 15295.6,10178.18 ccw(c15308.58,10169.94) 15297.73,10159.05 ; 15295.6,10178.18 ccw(c15308.58,10169.94) 15297.73,10159.05 ; 15295.6,10178.18 ccw(c15308.58,10169.94) 15297.73,10159.05 ; 15295.6,10178.18 ccw(c15308.58,10169.94) 15297.73,10159.05 ; 15295.6,10178.18 ccw(c15308.58,10169.94) 15297.73,10159.05 ; 15295.6,10178.18 ccw(c15308.58,10169.94) 15297.73,10159.05 ; 15295.6,10178.18 ccw(c15308.58,10169.94) 15297.73,10159.05 ; 15295.6,10178.18 ccw(c15308.58,10169.94) 15297.73,10159.05 ; 15295.6,10178.18 ccw(c15308.58,10169.94) 15297.73,10159.05 ; 15295.6,10178.18 ccw(c15308.58,10169.94) 15297.73,10159.05 ; 15297.73,10159.05 15307.62,10149.12 ; 15307.62,10149.12 cw(c15304.07,10145.59) 15309.07,10145.68 ; 15307.62,10149.12 cw(c15304.07,10145.59) 15309.07,10145.68 ; 15307.62,10149.12 cw(c15304.07,10145.59) 15309.07,10145.68 ; 15307.62,10149.12 cw(c15304.07,10145.59) 15309.07,10145.68 ; 15307.62,10149.12 cw(c15304.07,10145.59) 15309.07,10145.68 ; 15307.62,10149.12 cw(c15304.07,10145.59) 15309.07,10145.68 ; 15307.62,10149.12 cw(c15304.07,10145.59) 15309.07,10145.68 ; 15307.62,10149.12 cw(c15304.07,10145.59) 15309.07,10145.68 ; 15307.62,10149.12 cw(c15304.07,10145.59) 15309.07,10145.68 ; 15307.62,10149.12 cw(c15304.07,10145.59) 15309.07,10145.68 ; 15307.62,10149.12 cw(c15304.07,10145.59) 15309.07,10145.68 ; 15307.62,10149.12 cw(c15304.07,10145.59) 15309.07,10145.68 ; 15307.62,10149.12 cw(c15304.07,10145.59) 15309.07,10145.68 ; 15307.62,10149.12 cw(c15304.07,10145.59) 15309.07,10145.68 ; 15307.62,10149.12 cw(c15304.07,10145.59) 15309.07,10145.68 ; 15307.62,10149.12 cw(c15304.07,10145.59) 15309.07,10145.68 ; 15309.58,10336.08 cw(c15314.58,10336.08) 15311.02,10339.59 ; 15309.58,10336.08 cw(c15314.58,10336.08) 15311.02,10339.59 ; 15309.58,10336.08 cw(c15314.58,10336.08) 15311.02,10339.59 ; 15309.58,10336.08 cw(c15314.58,10336.08) 15311.02,10339.59 ; 15309.58,10336.08 cw(c15314.58,10336.08) 15311.02,10339.59 ; 15309.58,10336.08 cw(c15314.58,10336.08) 15311.02,10339.59 ; 15309.58,10336.08 cw(c15314.58,10336.08) 15311.02,10339.59 ; 15309.58,10336.08 cw(c15314.58,10336.08) 15311.02,10339.59 ; 15309.58,10336.08 cw(c15314.58,10336.08) 15311.02,10339.59 ; 15309.58,10336.08 cw(c15314.58,10336.08) 15311.02,10339.59 ; 15309.58,10336.08 cw(c15314.58,10336.08) 15311.02,10339.59 ; 15309.58,10336.08 cw(c15314.58,10336.08) 15311.02,10339.59 ; 15309.58,10336.08 cw(c15314.58,10336.08) 15311.02,10339.59 ; 15309.58,10336.08 cw(c15314.58,10336.08) 15311.02,10339.59 ; 15309.58,10336.08 cw(c15314.58,10336.08) 15311.02,10339.59 ; 15309.58,10336.08 cw(c15314.58,10336.08) 15311.02,10339.59 ; 15311.02,10339.59 15320.89,10349.46 ; 15320.89,10349.46 ccw(c15310,10360.32) 15323.62,10353.19 ; 15320.89,10349.46 ccw(c15310,10360.32) 15323.62,10353.19 ; 15320.89,10349.46 ccw(c15310,10360.32) 15323.62,10353.19 ; 15320.89,10349.46 ccw(c15310,10360.32) 15323.62,10353.19 ; 15320.89,10349.46 ccw(c15310,10360.32) 15323.62,10353.19 ; 15320.89,10349.46 ccw(c15310,10360.32) 15323.62,10353.19 ; 15320.89,10349.46 ccw(c15310,10360.32) 15323.62,10353.19 ; 15320.89,10349.46 ccw(c15310,10360.32) 15323.62,10353.19 ; 15320.89,10349.46 ccw(c15310,10360.32) 15323.62,10353.19 ; 15320.89,10349.46 ccw(c15310,10360.32) 15323.62,10353.19 ; 15320.89,10349.46 ccw(c15310,10360.32) 15323.62,10353.19 ; 15320.89,10349.46 ccw(c15310,10360.32) 15323.62,10353.19 ; 15320.89,10349.46 ccw(c15310,10360.32) 15323.62,10353.19 ; 15320.89,10349.46 ccw(c15310,10360.32) 15323.62,10353.19 ; 15320.89,10349.46 ccw(c15310,10360.32) 15323.62,10353.19 ; 15320.89,10349.46 ccw(c15310,10360.32) 15323.62,10353.19
  Bottom 6+gnd w5: U4.47@15308.83,10232.03 15309.58,10232.78 v1(15309.58,10294.1)
DD12: IC2.68 U3.48 U4.48 | length 1210.8
  Top Layer 1 w5: U3.48@15340.32,9771.4 v1@15340.32,9833.24 ; v1(15394.85,10384.63) 15395.22,10385 15395.22,10461.18 IC2.68@15395.48,10461.44
  Layer 3 w5: v1(15340.57,9833.49) 15340.57,10145.64 ; 15340.57,10195.56 15340.57,10293.63 v1(15340.33,10293.87) 15340.08,10294.12 15340.08,10327.78 ; v1(15394.85,10384.63) 15341.52,10331.3 ; 15328.56,10180.13 ccw(c15340.08,10169.94) 15329.21,10159.07 ; 15328.56,10180.13 ccw(c15340.08,10169.94) 15329.21,10159.07 ; 15328.56,10180.13 ccw(c15340.08,10169.94) 15329.21,10159.07 ; 15328.56,10180.13 ccw(c15340.08,10169.94) 15329.21,10159.07 ; 15328.56,10180.13 ccw(c15340.08,10169.94) 15329.2,10159.07 ; 15328.56,10180.13 ccw(c15340.08,10169.94) 15329.2,10159.07 ; 15328.56,10180.13 ccw(c15340.08,10169.94) 15329.2,10159.07 ; 15328.56,10180.13 ccw(c15340.08,10169.94) 15329.2,10159.07 ; 15328.56,10180.13 ccw(c15340.08,10169.94) 15329.2,10159.07 ; 15328.56,10180.13 ccw(c15340.08,10169.94) 15329.2,10159.07 ; 15328.56,10180.13 ccw(c15340.08,10169.94) 15329.2,10159.07 ; 15328.56,10180.13 ccw(c15340.08,10169.94) 15329.2,10159.07 ; 15328.56,10180.13 15339.31,10192.29 ; 15329.21,10159.07 15339.1,10149.17 ; 15339.1,10149.17 cw(c15335.57,10145.64) 15340.57,10145.67 ; 15339.1,10149.17 cw(c15335.57,10145.64) 15340.57,10145.67 ; 15339.1,10149.17 cw(c15335.57,10145.64) 15340.57,10145.67 ; 15339.1,10149.17 cw(c15335.57,10145.64) 15340.57,10145.67 ; 15339.1,10149.17 cw(c15335.57,10145.64) 15340.57,10145.67 ; 15339.1,10149.17 cw(c15335.57,10145.64) 15340.57,10145.67 ; 15339.1,10149.17 cw(c15335.57,10145.64) 15340.57,10145.67 ; 15339.1,10149.17 cw(c15335.57,10145.64) 15340.57,10145.67 ; 15339.1,10149.17 cw(c15335.57,10145.64) 15340.57,10145.67 ; 15339.1,10149.17 cw(c15335.57,10145.64) 15340.57,10145.67 ; 15339.1,10149.17 cw(c15335.57,10145.64) 15340.57,10145.67 ; 15339.1,10149.17 cw(c15335.57,10145.64) 15340.57,10145.67 ; 15339.1,10149.17 cw(c15335.57,10145.64) 15340.57,10145.67 ; 15339.1,10149.17 cw(c15335.57,10145.64) 15340.57,10145.67 ; 15339.1,10149.17 cw(c15335.57,10145.64) 15340.57,10145.67 ; 15339.1,10149.17 cw(c15335.57,10145.64) 15340.57,10145.67 ; 15339.31,10192.29 ccw(c15335.57,10195.6) 15340.57,10195.51 ; 15339.31,10192.29 ccw(c15335.57,10195.6) 15340.57,10195.51 ; 15339.31,10192.29 ccw(c15335.57,10195.6) 15340.57,10195.51 ; 15339.31,10192.29 ccw(c15335.57,10195.6) 15340.57,10195.51 ; 15339.31,10192.29 ccw(c15335.57,10195.6) 15340.57,10195.51 ; 15339.31,10192.29 ccw(c15335.57,10195.6) 15340.57,10195.51 ; 15339.31,10192.29 ccw(c15335.57,10195.6) 15340.57,10195.51 ; 15339.31,10192.29 ccw(c15335.57,10195.6) 15340.57,10195.51 ; 15339.31,10192.29 ccw(c15335.57,10195.6) 15340.57,10195.51 ; 15339.31,10192.29 ccw(c15335.57,10195.6) 15340.57,10195.51 ; 15339.31,10192.29 ccw(c15335.57,10195.6) 15340.57,10195.51 ; 15339.31,10192.29 ccw(c15335.57,10195.6) 15340.57,10195.51 ; 15339.31,10192.29 ccw(c15335.57,10195.6) 15340.57,10195.51 ; 15339.31,10192.29 ccw(c15335.57,10195.6) 15340.57,10195.51 ; 15339.31,10192.29 ccw(c15335.57,10195.6) 15340.57,10195.51 ; 15339.31,10192.29 ccw(c15335.57,10195.6) 15340.57,10195.51 ; 15340.08,10327.78 cw(c15345.08,10327.78) 15341.52,10331.3 ; 15340.08,10327.78 cw(c15345.08,10327.78) 15341.51,10331.29 ; 15340.08,10327.78 cw(c15345.08,10327.78) 15341.51,10331.29 ; 15340.08,10327.78 cw(c15345.08,10327.78) 15341.51,10331.29 ; 15340.08,10327.78 cw(c15345.08,10327.78) 15341.51,10331.29 ; 15340.08,10327.78 cw(c15345.08,10327.78) 15341.51,10331.29 ; 15340.08,10327.78 cw(c15345.08,10327.78) 15341.51,10331.29 ; 15340.08,10327.78 cw(c15345.08,10327.78) 15341.51,10331.29 ; 15340.08,10327.78 cw(c15345.08,10327.78) 15341.51,10331.29 ; 15340.08,10327.78 cw(c15345.08,10327.78) 15341.51,10331.29 ; 15340.08,10327.78 cw(c15345.08,10327.78) 15341.51,10331.29 ; 15340.08,10327.78 cw(c15345.08,10327.78) 15341.51,10331.29 ; 15340.08,10327.78 cw(c15345.08,10327.78) 15341.51,10331.29 ; 15340.08,10327.78 cw(c15345.08,10327.78) 15341.51,10331.29 ; 15340.08,10327.78 cw(c15345.08,10327.78) 15341.51,10331.29 ; 15340.08,10327.78 cw(c15345.08,10327.78) 15341.51,10331.29
  Bottom 6+gnd w5: U4.48@15340.33,10232.03 v1(15340.33,10293.87)
DD13: IC2.77 U3.50 U4.50 | length 1358.1
  Top Layer 1 w5: U3.50@15403.31,9771.4 v1@15403.31,9833.24 ; v1(15419.85,10619.63) 15420.26,10619.21 15479.52,10619.21 15479.93,10618.8 ; 15480.01,10618.88 IC2.77@15552.61,10618.88
  Layer 3 w5: 15392.17,10159.1 cw(c15403.07,10169.94) 15391.55,10180.12 15402.31,10192.29 ; 15392.18,10159.1 15402.1,10149.12 ; v1(15403.56,9833.49) 15403.56,10145.64 ; 15403.56,10195.56 15403.56,10293.63 v1(15403.07,10294.12) 15403.07,10315.78 ; v1(15419.85,10619.63) 15425.22,10354.94 ; 15402.1,10149.12 cw(c15398.56,10145.59) 15403.56,10145.68 ; 15402.1,10149.12 cw(c15398.56,10145.59) 15403.56,10145.68 ; 15402.1,10149.12 cw(c15398.56,10145.59) 15403.56,10145.68 ; 15402.1,10149.12 cw(c15398.56,10145.59) 15403.56,10145.68 ; 15402.1,10149.12 cw(c15398.56,10145.59) 15403.56,10145.68 ; 15402.1,10149.12 cw(c15398.56,10145.59) 15403.56,10145.68 ; 15402.1,10149.12 cw(c15398.56,10145.59) 15403.56,10145.68 ; 15402.1,10149.12 cw(c15398.56,10145.59) 15403.56,10145.68 ; 15402.1,10149.12 cw(c15398.56,10145.59) 15403.56,10145.68 ; 15402.1,10149.12 cw(c15398.56,10145.59) 15403.56,10145.68 ; 15402.1,10149.12 cw(c15398.56,10145.59) 15403.56,10145.68 ; 15402.1,10149.12 cw(c15398.56,10145.59) 15403.56,10145.68 ; 15402.1,10149.12 cw(c15398.56,10145.59) 15403.56,10145.68 ; 15402.1,10149.12 cw(c15398.56,10145.59) 15403.56,10145.68 ; 15402.1,10149.12 cw(c15398.56,10145.59) 15403.56,10145.68 ; 15402.1,10149.12 cw(c15398.56,10145.59) 15403.56,10145.68 ; 15402.31,10192.29 ccw(c15398.56,10195.6) 15403.56,10195.51 ; 15402.31,10192.29 ccw(c15398.56,10195.6) 15403.56,10195.51 ; 15402.31,10192.29 ccw(c15398.56,10195.6) 15403.56,10195.51 ; 15402.31,10192.29 ccw(c15398.56,10195.6) 15403.56,10195.51 ; 15402.31,10192.29 ccw(c15398.56,10195.6) 15403.56,10195.51 ; 15402.31,10192.29 ccw(c15398.56,10195.6) 15403.56,10195.51 ; 15402.31,10192.29 ccw(c15398.56,10195.6) 15403.56,10195.51 ; 15402.31,10192.29 ccw(c15398.56,10195.6) 15403.56,10195.51 ; 15402.31,10192.29 ccw(c15398.56,10195.6) 15403.56,10195.51 ; 15402.31,10192.29 ccw(c15398.56,10195.6) 15403.56,10195.51 ; 15402.31,10192.29 ccw(c15398.56,10195.6) 15403.56,10195.51 ; 15402.31,10192.29 ccw(c15398.56,10195.6) 15403.56,10195.51 ; 15402.31,10192.29 ccw(c15398.56,10195.6) 15403.56,10195.51 ; 15402.31,10192.29 ccw(c15398.56,10195.6) 15403.56,10195.51 ; 15402.31,10192.29 ccw(c15398.56,10195.6) 15403.56,10195.51 ; 15402.31,10192.29 ccw(c15398.56,10195.6) 15403.56,10195.51 ; 15403.07,10315.78 cw(c15408.07,10315.78) 15403.94,10318.59 ; 15403.07,10315.78 cw(c15408.07,10315.78) 15403.94,10318.59 ; 15403.07,10315.78 cw(c15408.07,10315.78) 15403.94,10318.59 ; 15403.07,10315.78 cw(c15408.07,10315.78) 15403.94,10318.59 ; 15403.07,10315.78 cw(c15408.07,10315.78) 15403.94,10318.59 ; 15403.07,10315.78 cw(c15408.07,10315.78) 15403.94,10318.59 ; 15403.07,10315.78 cw(c15408.07,10315.78) 15403.94,10318.59 ; 15403.07,10315.78 cw(c15408.07,10315.78) 15403.94,10318.59 ; 15403.07,10315.78 cw(c15408.07,10315.78) 15403.94,10318.59 ; 15403.07,10315.78 cw(c15408.07,10315.78) 15403.94,10318.59 ; 15403.07,10315.78 cw(c15408.07,10315.78) 15403.94,10318.59 ; 15403.07,10315.78 cw(c15408.07,10315.78) 15403.94,10318.59 ; 15403.07,10315.78 cw(c15408.07,10315.78) 15403.94,10318.59 ; 15403.07,10315.78 cw(c15408.07,10315.78) 15403.94,10318.59 ; 15403.07,10315.78 cw(c15408.07,10315.78) 15403.94,10318.59 ; 15403.07,10315.78 cw(c15408.07,10315.78) 15403.94,10318.59 ; 15403.94,10318.59 15422.56,10345.98 ; 15422.56,10345.98 ccw(c15409.85,10354.63) 15425.22,10354.94 ; 15422.56,10345.98 ccw(c15409.85,10354.63) 15425.22,10354.94 ; 15422.56,10345.98 ccw(c15409.85,10354.63) 15425.22,10354.94 ; 15422.56,10345.98 ccw(c15409.85,10354.63) 15425.22,10354.94 ; 15422.56,10345.98 ccw(c15409.85,10354.63) 15425.22,10354.94 ; 15422.56,10345.98 ccw(c15409.85,10354.63) 15425.22,10354.94 ; 15422.56,10345.98 ccw(c15409.85,10354.63) 15425.22,10354.94 ; 15422.56,10345.98 ccw(c15409.85,10354.63) 15425.22,10354.94 ; 15422.56,10345.98 ccw(c15409.85,10354.63) 15425.22,10354.94 ; 15422.56,10345.98 ccw(c15409.85,10354.63) 15425.22,10354.94 ; 15422.56,10345.98 ccw(c15409.85,10354.63) 15425.22,10354.94 ; 15422.56,10345.98 ccw(c15409.85,10354.63) 15425.22,10354.94 ; 15422.56,10345.98 ccw(c15409.85,10354.63) 15425.22,10354.94 ; 15422.56,10345.98 ccw(c15409.85,10354.63) 15425.22,10354.94 ; 15422.56,10345.98 ccw(c15409.85,10354.63) 15425.22,10354.94 ; 15422.56,10345.98 ccw(c15409.85,10354.63) 15425.22,10354.94
  Bottom 6+gnd w5: U4.50@15403.31,10232.03 v1@15403.31,10293.87
DD14: IC2.78 U3.51 U4.51 | length 1106.9
  Top Layer 1 w5: U3.51@15434.81,9771.4 v1@15434.81,9833.24 ; v1@15500.16,10638.41 IC2.78@15552.45,10638.41
  Layer 3 w5: v1(15435.06,9833.49) 15435.06,10145.64 ; 15435.06,10195.56 v1(15435.06,10290.22) 15435.06,10311.14 cw(c15440.06,10311.14) 15435.22,10312.4 15444.03,10345.53 ccw(c15409.85,10354.63) 15445.19,10353.12 15449.89,10463.17 ; 15449.89,10463.2 cw(c15454.88,10462.93) 15449.9,10463.3 15449.92,10463.62 cw(c15464.88,10462.47) 15450.46,10466.62 v1(15499.93,10638.17) ; 15433.6,10149.12 cw(c15430.06,10145.59) 15435.06,10145.68 ; 15433.6,10149.12 cw(c15430.06,10145.59) 15435.06,10145.68 ; 15433.6,10149.12 cw(c15430.06,10145.59) 15435.06,10145.68 ; 15433.6,10149.12 cw(c15430.06,10145.59) 15435.06,10145.68 ; 15433.6,10149.12 cw(c15430.06,10145.59) 15435.06,10145.68 ; 15433.6,10149.12 cw(c15430.06,10145.59) 15435.06,10145.68 ; 15433.6,10149.12 cw(c15430.06,10145.59) 15435.06,10145.68 ; 15433.6,10149.12 cw(c15430.06,10145.59) 15435.06,10145.68 ; 15433.6,10149.12 cw(c15430.06,10145.59) 15435.06,10145.68 ; 15433.6,10149.12 cw(c15430.06,10145.59) 15435.06,10145.68 ; 15433.6,10149.12 cw(c15430.06,10145.59) 15435.06,10145.68 ; 15433.6,10149.12 cw(c15430.06,10145.59) 15435.06,10145.68 ; 15433.6,10149.12 cw(c15430.06,10145.59) 15435.06,10145.68 ; 15433.6,10149.12 cw(c15430.06,10145.59) 15435.06,10145.68 ; 15433.6,10149.12 cw(c15430.06,10145.59) 15435.06,10145.68 ; 15433.6,10149.12 cw(c15430.06,10145.59) 15435.06,10145.68 ; 15433.6,10149.12 15423.67,10159.1 cw(c15434.57,10169.94) 15423.04,10180.12 15433.8,10192.29 ; 15433.8,10192.29 ccw(c15430.06,10195.6) 15435.06,10195.51 ; 15433.8,10192.29 ccw(c15430.06,10195.6) 15435.06,10195.51 ; 15433.8,10192.29 ccw(c15430.06,10195.6) 15435.06,10195.51 ; 15433.8,10192.29 ccw(c15430.06,10195.6) 15435.06,10195.51 ; 15433.8,10192.29 ccw(c15430.06,10195.6) 15435.06,10195.51 ; 15433.8,10192.29 ccw(c15430.06,10195.6) 15435.06,10195.51 ; 15433.8,10192.29 ccw(c15430.06,10195.6) 15435.06,10195.51 ; 15433.8,10192.29 ccw(c15430.06,10195.6) 15435.06,10195.51 ; 15433.8,10192.29 ccw(c15430.06,10195.6) 15435.06,10195.51 ; 15433.8,10192.29 ccw(c15430.06,10195.6) 15435.06,10195.51 ; 15433.8,10192.29 ccw(c15430.06,10195.6) 15435.06,10195.51 ; 15433.8,10192.29 ccw(c15430.06,10195.6) 15435.06,10195.51 ; 15433.8,10192.29 ccw(c15430.06,10195.6) 15435.06,10195.51 ; 15433.8,10192.29 ccw(c15430.06,10195.6) 15435.06,10195.51 ; 15433.8,10192.29 ccw(c15430.06,10195.6) 15435.06,10195.51 ; 15433.8,10192.29 ccw(c15430.06,10195.6) 15435.06,10195.51
  Bottom 6+gnd w5: U4.51@15434.81,10232.03 15435.06,10232.28 v1(15435.06,10290.22)
DD15: IC2.79 U3.53 U4.53 | length 1158
  Top Layer 1 w5: U3.53@15497.8,9771.46 v1@15497.8,9833.24 ; IC2.79@15552.61,10658.25 15552.8,10658.06 15607.9,10658.06 v1(15608.09,10657.87)
  Layer 3 w5: v1(15498.05,9833.49) 15498.05,10145.64 ; 15498.05,10195.56 15498.05,10293.63 v1(15497.56,10294.12) 15497.56,10327.34 15502.95,10332.73 15502.95,10491.51 cw(c15507.95,10491.51) 15503.73,10494.2 v1(15608.09,10657.87) ; 15496.59,10149.12 cw(c15493.05,10145.59) 15498.05,10145.68 ; 15496.59,10149.12 cw(c15493.05,10145.59) 15498.05,10145.68 ; 15496.59,10149.12 cw(c15493.05,10145.59) 15498.05,10145.68 ; 15496.59,10149.12 cw(c15493.05,10145.59) 15498.05,10145.68 ; 15496.59,10149.12 cw(c15493.05,10145.59) 15498.05,10145.68 ; 15496.59,10149.12 cw(c15493.05,10145.59) 15498.05,10145.68 ; 15496.59,10149.12 cw(c15493.05,10145.59) 15498.05,10145.68 ; 15496.59,10149.12 cw(c15493.05,10145.59) 15498.05,10145.68 ; 15496.59,10149.12 cw(c15493.05,10145.59) 15498.05,10145.68 ; 15496.59,10149.12 cw(c15493.05,10145.59) 15498.05,10145.68 ; 15496.59,10149.12 cw(c15493.05,10145.59) 15498.05,10145.68 ; 15496.59,10149.12 cw(c15493.05,10145.59) 15498.05,10145.68 ; 15496.59,10149.12 cw(c15493.05,10145.59) 15498.05,10145.68 ; 15496.59,10149.12 cw(c15493.05,10145.59) 15498.05,10145.68 ; 15496.59,10149.12 cw(c15493.05,10145.59) 15498.05,10145.68 ; 15496.59,10149.12 cw(c15493.05,10145.59) 15498.05,10145.68 ; 15496.59,10149.12 15486.66,10159.1 cw(c15497.56,10169.94) 15486.03,10180.12 15496.79,10192.29 ; 15496.79,10192.29 ccw(c15493.05,10195.6) 15498.05,10195.51 ; 15496.79,10192.29 ccw(c15493.05,10195.6) 15498.05,10195.51 ; 15496.79,10192.29 ccw(c15493.05,10195.6) 15498.05,10195.51 ; 15496.79,10192.29 ccw(c15493.05,10195.6) 15498.05,10195.51 ; 15496.79,10192.29 ccw(c15493.05,10195.6) 15498.05,10195.51 ; 15496.79,10192.29 ccw(c15493.05,10195.6) 15498.05,10195.51 ; 15496.79,10192.29 ccw(c15493.05,10195.6) 15498.05,10195.51 ; 15496.79,10192.29 ccw(c15493.05,10195.6) 15498.05,10195.51 ; 15496.79,10192.29 ccw(c15493.05,10195.6) 15498.05,10195.51 ; 15496.79,10192.29 ccw(c15493.05,10195.6) 15498.05,10195.51 ; 15496.79,10192.29 ccw(c15493.05,10195.6) 15498.05,10195.51 ; 15496.79,10192.29 ccw(c15493.05,10195.6) 15498.05,10195.51 ; 15496.79,10192.29 ccw(c15493.05,10195.6) 15498.05,10195.51 ; 15496.79,10192.29 ccw(c15493.05,10195.6) 15498.05,10195.51 ; 15496.79,10192.29 ccw(c15493.05,10195.6) 15498.05,10195.51 ; 15496.79,10192.29 ccw(c15493.05,10195.6) 15498.05,10195.51
  Bottom 6+gnd w5: U4.53@15497.8,10232.03 v1@15497.8,10293.87
DISP_CLK_3: J3.7 J7.1 J7.3 | length 507.8
  Top Layer 1 w10: v1@16098.03,8603.3 J7.1@16098.03,8635.04 J7.3@16153.15,8635.04
  Layer 3 w5: v1(16008.54,8261.31) v1(16098.26,8603.07)
  Bottom 6+gnd w5: v1(16008.54,8261.31) 16008.54,8276.85 16008.66,8276.97 J3.7@16008.66,8328.82
DISP_DI_3: J3.5 J9.1 J9.3 | length 500.6
  Top Layer 1 w10: v1(15982.04,8603.19) 15981.81,8603.42 J9.3@15981.81,8635.16 J9.1@16036.93,8635.16
  Layer 3 w5: v1(15929.8,8261.31) v1(15982.04,8603.19)
  Bottom 6+gnd w5: v1(15929.8,8261.31) 15929.8,8276.85 15929.92,8276.97 J3.5@15929.92,8328.82
DISP_DO_3: J3.6 J14.1 | length 553.6
  Top Layer 1 w10: J14.1@16213.15,8635.04 16213.38,8634.81 v1(16213.38,8601.85)
  Layer 3 w5: v1(15969.41,8248.69) 16007.44,8245.97 ccw(c16008.54,8261.31) 16022.01,8253.9 v1(16213.38,8601.85)
  Bottom 6+gnd w5: J3.6@15969.29,8181.18 15969.29,8233.03 15969.41,8233.15 v1(15969.41,8248.69)
DISP_NSS_3: J3.8 J14.3 | length 517.1
  Top Layer 1 w10: J14.3@16268.27,8635.04 16268.5,8634.81 v1(16268.5,8601.85)
  Layer 3 w5: v1(16048.15,8248.69) v1(16268.5,8601.85)
  Bottom 6+gnd w5: J3.8@16048.03,8181.18 16048.03,8233.03 16048.15,8233.15 v1(16048.15,8248.69)
EXPR1_L_11: J15.2 J15.4 PJ2.26 | length 712.6
  Top Layer 1 w5: J15.2@17777.56,12111.42 J15.4@17832.68,12111.42
  Top Layer 1 w10: J15.2@17777.56,12111.42 v3(17777.56,12153.86)
  Unused w5: v1(17900,12445) 18168.4,12445 ccw(c18168.4,12450) 18171.95,12446.48 PJ2.26@18172.56,12447.09
  Layer 3 w20: v3(17777.56,12153.86) 17900,12276.3 v1(17900,12445)
EXPR1_R_11: J16.2 J16.4 PJ2.24 | length 1014.7
  Top Layer 1 w5: J16.2@17657.44,12112.64 J16.4@17712.56,12112.64
  Top Layer 1 w10: J16.4@17712.56,12112.64 v3(17712.56,12153.86)
  Unused w5: v1(17855,12695) 18168.4,12695 ccw(c18168.4,12700) 18171.92,12696.45 PJ2.24@18172.56,12697.09
  Layer 3 w20: v3(17712.56,12153.86) 17855,12296.3 v1(17855,12695)
EXPR2_L_11: J17.2 J17.4 PJ2.6 | length 732.4
  Top Layer 1 w5: J17.2@17892.56,12111.42 J17.4@17947.68,12111.42
  Top Layer 1 w10: v3(17947.56,12168.86) 17947.56,12111.54 J17.4@17947.68,12111.42
  Unused w5: v1(17945.59,12584.65) 18133.28,12584.65 cw(c18133.28,12579.65) 18136.81,12583.19 PJ2.6@18145,12575
  Layer 3 w20: v1(17945.59,12584.65) 17945.8,12584.44 17945.8,12173.18 17946.87,12172.11 17946.87,12169.55 v3(17947.56,12168.86)
EXPR2_R_11: J18.2 J18.4 PJ2.4 | length 878.1
  Top Layer 1 w5: J18.2@18012.56,12111.42 J18.4@18067.68,12111.42
  Top Layer 1 w10: v3(18067.56,12143.86) 18067.56,12111.54 J18.4@18067.68,12111.42
  Unused w5: v1(18045,12825) PJ2.4@18145,12825
  Layer 3 w20: v1(18045,12825) 18045,12166.42 v3(18067.56,12143.86)
FLASH_CLK_6: IC1.22 IC55.6 | length 1345.9
  Top Layer 1 w5: IC1.22@16015.39,10819.92 v1@16070.28,10819.92 ; v1(17117.94,10865.88) 17117.94,11060.34 IC55.6@17118.15,11060.55
  Unused w5: v1(16070.35,10819.85) 16567.11,10819.85 ccw(c16567.11,10824.85) 16570.63,10821.3 16606.4,10857.07 cw(c16609.92,10853.51) 16609.92,10858.51 16691.39,10858.51 ccw(c16691.39,10863.51) 16694.5,10859.6 16702.8,10866.09 ccw(c16699.72,10870.03) 16703.24,10866.48 16739.13,10902.37 cw(c16742.65,10898.82) 16742.65,10903.82 16827.17,10903.82 cw(c16827.17,10898.82) 16830.68,10902.37 16866.13,10867.33 ccw(c16869.66,10870.88) 16869.66,10865.88 v1(17117.94,10865.88)